# Altium PCB NPU_project_ICE40.PcbDoc
Units mil, origin at the board's own origin, x right, y up, seen from the top; angles counter-clockwise.
Board outline 5540 x 3427.51 mil, 2 copper layers (Top Layer, Bottom Layer); 42 components, 46 nets, 315 pads, 93 vias.
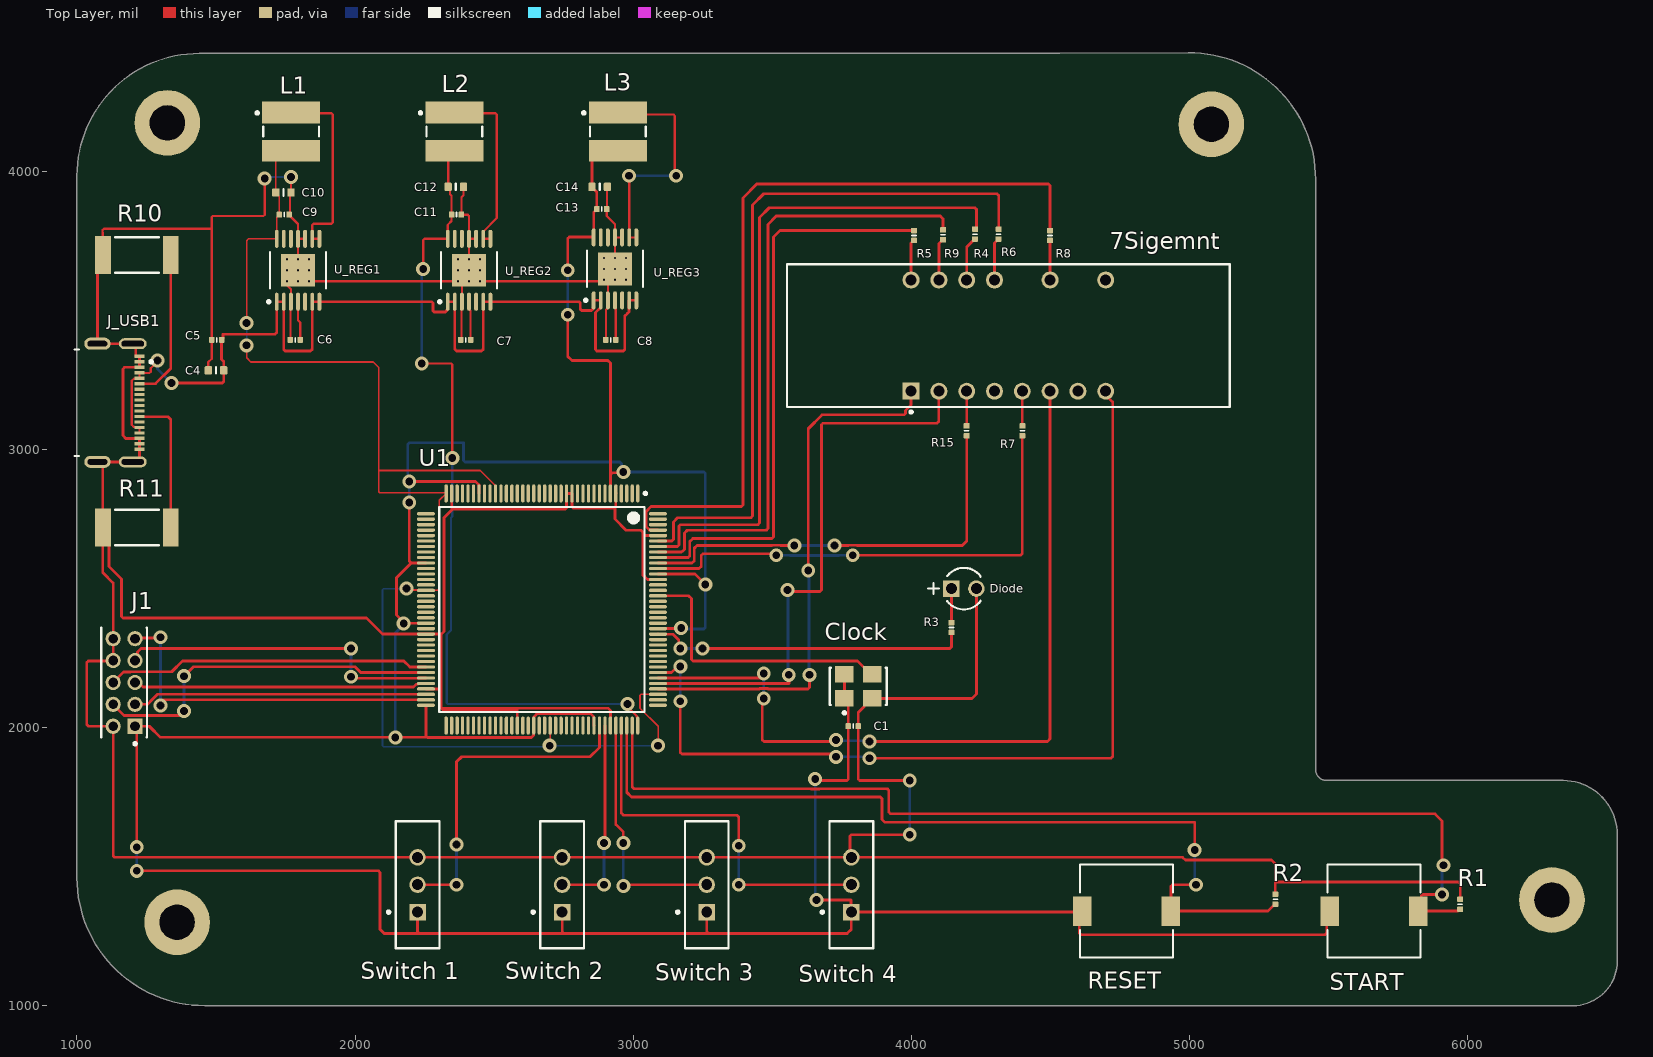
[diagram p0: Top Layer view]
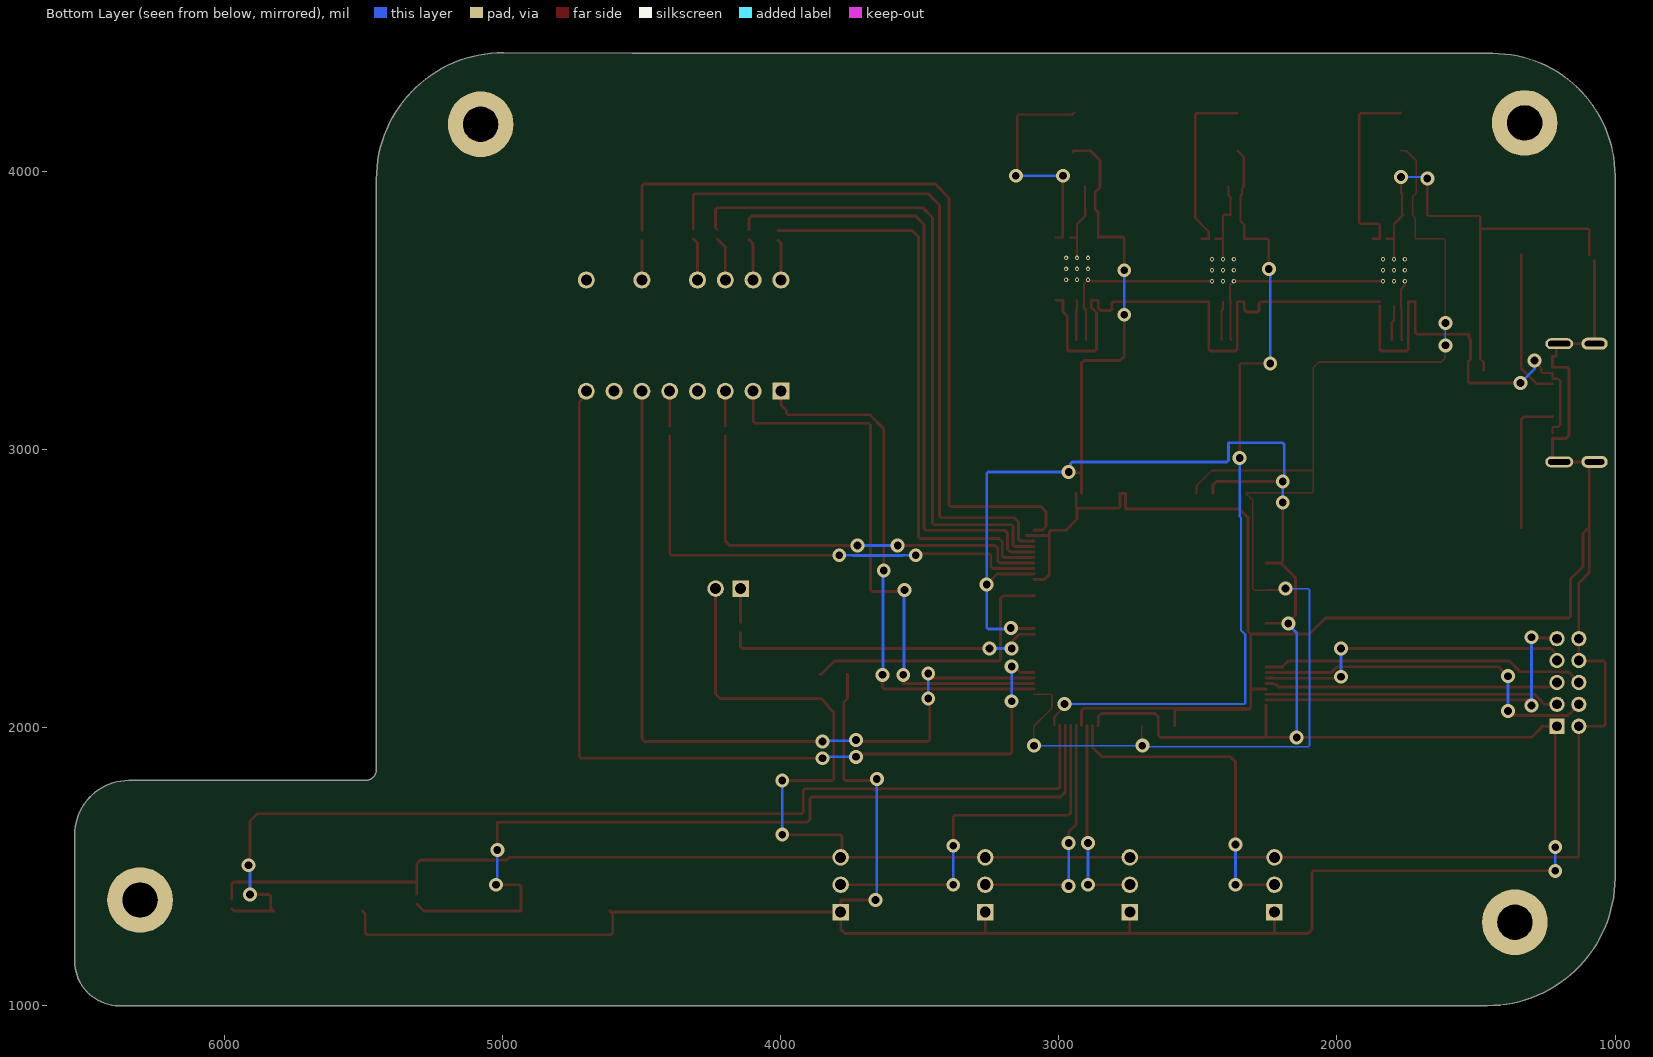
[diagram p1: Bottom Layer view, seen from below]
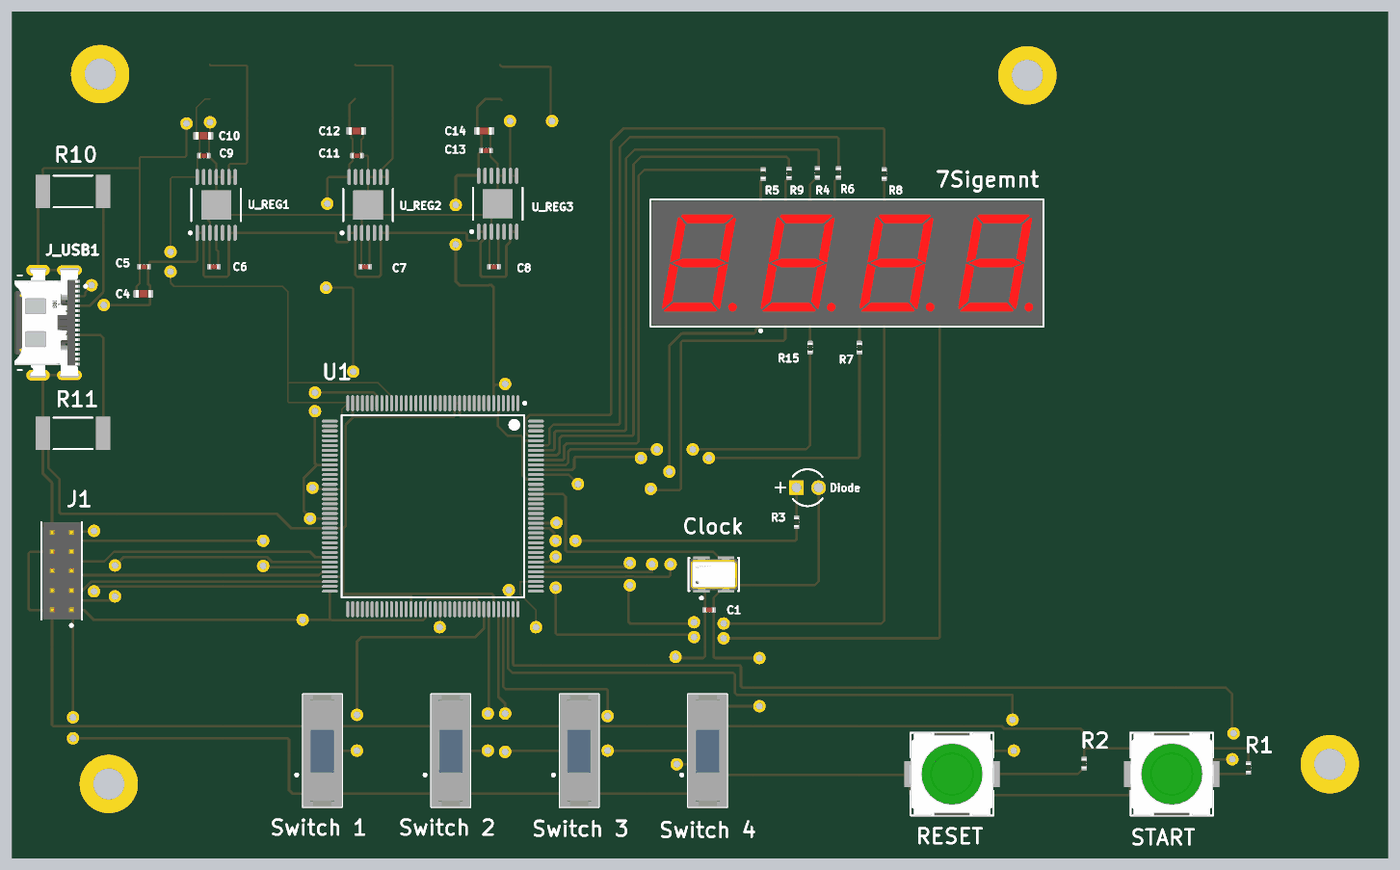
[diagram p2: 3D render of the assembled board from above, using the file's embedded part models]

## Layer stack, top to bottom
Top Solder: solder mask 0.4, Solder Resist, Dk 3.5
Top Layer: signal copper 1.4
Dielectric 1: dielectric 12.6, FR-4, Dk 4.8
Bottom Layer: signal copper 1.4
Bottom Solder: solder mask 0.4, Solder Resist, Dk 3.5

## Board outline
6380,1000 ccw(c6380,1160) 6540,1160 6540,1615 ccw(c6345,1615) 6345,1810 5495,1810 cw(c5495,1850) 5455,1850 5455,3505 ccw(c4633.91,3505.22) 5454.99,3510 5454.99,3971.59 ccw(c4999.06,3971.59) 4996.58,4427.51 4535,4425 1980,4425 cw(c1980,4474.97) 1975.47,4425.21 1975.47,4425 1440,4425 ccw(c1440,3985) 1000,3985 1000,1460 ccw(c1460,1460) 1460,1000

## Design rules (kind name [scope] priority, off if disabled: settings)
Clearance [All] p1: gap=6 ignorepadtopadclearanceinfootprint=TRUE
HoleSize [All] p1: absolutevalues=TRUE maxlimit=125.98 minlimit=0.98 maxpercent=80.000 minpercent=20.000
MinimumSolderMaskSliver [All] p1: minsoldermaskwidth=4
PolygonConnect [All] p1: connectstyle=Relief reliefconductorwidth=10 reliefentries=4 polygonreliefangle="90 Angle" airgapwidth=10
RoutingVias [All] p1: holewidth=28 width=50 viastyle="Through Hole" minholewidth=28 minwidth=50 maxholewidth=28 maxwidth=50
SilkToSilkClearance [All] p1: silktosilkclearance=4
SilkToSolderMaskClearance [IsPad] p1: minsilkscreentomaskgap=4 clearancetoexposedcopper=TRUE
SolderMaskExpansion [All] p1: expansion=0 istentingtop=FALSE
SupplyNets "Schematic Supply Nets_4" [InNet('+3V3')] p1: voltage=0.000
SupplyNets "Schematic Supply Nets_3" [InNet('+1V2')] p2: voltage=0.000
SupplyNets "Schematic Supply Nets_2" [InNet('GND')] p3: voltage=0.000
SupplyNets "Schematic Supply Nets_1" [InNet('+5V_IN')] p4: voltage=0.000
SupplyNets "Schematic Supply Nets" [InNet('+2V5')] p5: voltage=0.000
Width [All] p1: maxlimit=10 minlimit=6 preferedwidth=8 minimp=50.000000 maximp=50.000000 favimp=50.000000
26 further rules are at their usual default settings.

## Classes and differential pairs
component class PowerSupply: C4 C5 C6 C7 C8 C9 C10 C11 C12 C13 C14 J_USB1 L1 L2 L3 R10 R11 U_REG1 U_REG2 U_REG3
component class InputOutput: 7Sigemnt Diode R1 R2 R3 R4 R5 R6 R7 R8 R9 R15 RESET START "Switch 1" "Switch 2" "Switch 3" "Switch 4"
component class Input_Output: U1
component class Configuration: J1
component class Clock: C1 Clock

## Components (designator, comment, footprint, x,y, rotation, side; value= is the part's Value field where it differs from the comment)
7Sigemnt "LTC-4627G" FP-LTC-4627G-MFG 4350,3410 r0 top
C1 "Capacitor 100nF +/-20% 50V 0402" CAPC0402(1005)60_L 3791.97,2005 r180 top value=100nF (schematic designator С1)
C4 "Capacitor 10µF +/-20% 10V 0603" CAPC0603(1608)100_L 1500,3285 r180 top value=10µF (schematic designator С4)
C5 "Capacitor 100nF +/-20% 50V 0402" CAPC0402(1005)60_L 1502.28,3395 r180 top value=100nF (schematic designator С5)
C6 "Capacitor 100nF +/-20% 50V 0402" CAPC0402(1005)60_L 1785,3395 r0 top value=100nF (schematic designator С6)
C7 "Capacitor 100nF +/-20% 50V 0402" CAPC0402(1005)60_L 2397.72,3395 r0 top value=100nF (schematic designator С7)
C8 "Capacitor 100nF +/-20% 50V 0402" CAPC0402(1005)60_L 2920,3395 r0 top value=100nF (schematic designator С8)
C9 "Capacitor 100nF +/-20% 50V 0402" CAPC0402(1005)60_L 1745,3845 r0 top value=100nF (schematic designator С9)
C10 "Capacitor 10µF +/-20% 10V 0603" CAPC0603(1608)100_L 1742.44,3925 r0 top value=10µF (schematic designator С10)
C11 "Capacitor 100nF +/-20% 50V 0402" CAPC0402(1005)60_L 2365,3845 r0 top value=100nF
C12 "Capacitor 10µF +/-20% 10V 0603" CAPC0603(1608)100_L 2362.44,3945 r0 top value=10µF
C13 "Capacitor 100nF +/-20% 50V 0402" CAPC0402(1005)60_L 2887.28,3865 r0 top value=100nF
C14 "Capacitor 10µF +/-20% 10V 0603" CAPC0603(1608)100_L 2880,3945 r0 top value=10µF
Clock "ASFL1-100.000MHZ-EC-T" FP-ASFL1-MFG 3810,2148.31 r0 top
Diode "304090040" LED-2P-2.28-3MM 4189.88,2500 r0 top
J1 "TMM-105-01-L-D" FP-TMM-105-01-L-D-MFG 1169.37,2162.48 r90 top
J_USB1 "CX90M-16P" FP-CX90M-16P-MFG 1105.91,3168.27 r270 top
L1 "74408941010" WE-SPC_4818 51770,54143.9 r0 top
L2 "74408941010" WE-SPC_4818 52357.5,54143.9 r0 top
L3 "74408941010" WE-SPC_4818 52945,54143.9 r0 top
R1 "10KR2F" RESC0402(1005)_L 5975,1365 r90 top value=10k
R2 "10KR2F" RESC0402(1005)_L 5310,1382.72 r90 top value=10k
R3 "330R2J" RESC0402(1005)_L 4145,2360 r90 top value=330
R4 "330R2J" RESC0402(1005)_L 4230,3775 r270 top value=330
R5 "330R2J" RESC0402(1005)_L 4010,3770 r270 top value=330
R6 "330R2J" RESC0402(1005)_L 4315,3775 r270 top value=330
R7 "330R2J" RESC0402(1005)_L 4400,3067.28 r90 top value=330
R8 "330R2J" RESC0402(1005)_L 4500,3770 r270 top value=330
R9 "330R2J" RESC0402(1005)_L 4115,3772.72 r270 top value=330
R10 "5.1K" RESC2512(6432)_M 1215,3700 r180 top
R11 "5.1K" RESC2512(6432)_M 1215,2720 r180 top
R15 "330R2J" RESC0402(1005)_L 4200,3067.28 r90 top value=330
RESET "SKSTAAE010" FP-SKSTAAE010-MFG 4775,1340 r0 top
START "SKSTAAE010" FP-SKSTAAE010-MFG 5665,1340 r0 top
"Switch 1" "EG1218" ESWI-EG1218_V 2225,1435 r90 top
"Switch 2" "EG1218" ESWI-EG1218_V 2745,1435 r90 top
"Switch 3" "EG1218" ESWI-EG1218_V 3265,1435 r90 top
"Switch 4" "EG1218" ESWI-EG1218_V 3785,1435 r90 top
U1 "ICE40HX1K-TQ144" LATC-TQFP-144_N 2672.32,2424.84 r270 top
U_REG1 "LM2852XMXA-1.2/NOPB" MXA14A_N 1795,3645 r90 top
U_REG2 "LM2852XMXA-2.5/NOPB" MXA14A_N 2410,3645 r90 top
U_REG3 "LM2852XMXA-3.3/NOPB" MXA14A_N 2935,3650 r90 top

## Footprints (in the part's own frame and the unit in brackets; to place one, negate y for a bottom-side part, rotate by r counter-clockwise, add the part's x,y. Pads: shape width x height; smd on the part's side, far side on the other; paste and mask are expansions set on the pad)
CAPC0402(1005)60_L [mm] "Chip Capacitor, Body 1.0x0.5mm, Height 0.6mm, IPC High Density"
  rrect25% 0.5x0.55 smd: 1(-0.45,0) 2(0.45,0)
  silkscreen extent 0,-0.2 0,0.2, body extent -0.5,-0.25 0.5,0.25, height 0.6
CAPC0603(1608)100_L [mil] "Chip Capacitor, Body 1.6x0.8mm, Height 1.0mm, IPC High Density"
  rrect25% 26x29.92 smd: 1(-27.56,0) 2(27.56,0)
  silkscreen extent 0,-12 0,12, body extent -31,-16 31,16, height 37
ESWI-EG1218_V [mm] "THD, 3-Leads, Body 11.6x4mm, Pitch 2.5mm"
  rect 1.5x1.5 hole 1: 1(-2.5,0)
  round 1.5 hole 1: 2(0,0) 3(2.5,0)
  silkscreen extent -5.8,-2 5.8,2.77, body extent -5.8,-2 5.8,2, height 7.4
FP-ASFL1-MFG [mm]
  rect 1.7x1.5 smd paste+0 mask+0: 1(-1.27,-1.1) 2(1.27,-1.1) 3(1.27,1.1) 4(-1.27,1.1)
  silkscreen extent -2.6,-2.54 2.6,1.7, body extent -2.7,-1.95 2.7,1.95, height 0.25
FP-CX90M-16P-MFG [mm]
  rect 0.3x0.9 smd paste+0 mask+0: 1(-4.25,3.025) 2(4.25,3.025) A1(-3.75,3.025) A4(-2.75,3.025) A5(-1.75,3.025) A6(-0.75,3.025) A7(0.75,3.025) A8(1.75,3.025) A9(2.75,3.025) A12(3.75,3.025) B1(3.25,3.025) B4(2.25,3.025) B5(1.25,3.025) B6(0.25,3.025) B7(-0.25,3.025) B8(-1.25,3.025) B9(-2.25,3.025) B12(-3.25,3.025)
  rrect100% 1x2.55 hole 2.05 slot 0.5 at 0 deg paste-2539.97 mask+0: 3(-5.4,2.405) 4(5.4,2.405)
  rrect100% 1.1x2.4 hole 1.8 slot 0.5 at 0 deg paste-2539.97 mask+0: 5(-5.4,-0.825) 6(5.4,-0.825)
  silkscreen extent -4.87,-2.9 4.87,4.2, body extent -6.05,-3.37 6.05,3.78, height 0.25
FP-LTC-4627G-MFG [mm]
  rect 1.55x1.55 hole 1 paste-2539.97 mask+0: 1(-8.89,-5.08)
  round 1.55 hole 1 paste-2539.97 mask+0: 2(-6.35,-5.08) 3(-3.81,-5.08) 4(-1.27,-5.08) 5(1.27,-5.08) 6(3.81,-5.08) 7(6.35,-5.08) 8(8.89,-5.08) 9(8.89,5.08) 11(3.81,5.08) 13(-1.27,5.08) 14(-3.81,5.08) 15(-6.35,5.08) 16(-8.89,5.08)
  silkscreen extent -20.21,-7.1 20.21,6.53, body extent -20.31,-6.63 20.31,6.63, height 0.25
FP-SKSTAAE010-MFG [mm]
  rect 1.7x2.7 smd paste+0 mask+0: 1(-4.05,0) 2(4.05,0)
  silkscreen extent -4.25,-4.25 4.25,4.25, body extent -5,-4.35 5,4.35, height 0.25
FP-TMM-105-01-L-D-MFG [mm]
  rect 1.39x1.39 hole 0.89 paste-2539.97 mask+0: 1(-4,-1)
  round 1.39 hole 0.89 paste-2539.97 mask+0: 2(-4,1) 3(-2,-1) 4(-2,1) 5(0,-1) 6(0,1) 7(2,-1) 8(2,1) 9(4,-1) 10(4,1)
  silkscreen extent -5.72,-2.09 5,2.09, body extent -5.1,-2.13 5.1,2.13, height 0.25
LATC-TQFP-144_N [mm] "QFP, 144-Leads, Body 20x20mm, Pitch 0.5mm, IPC Medium Density"
  oval 1.65x0.3 smd: 1(-10.6,8.75) 2(-10.6,8.25) 3(-10.6,7.75) 4(-10.6,7.25) 5(-10.6,6.75) 6(-10.6,6.25) 7(-10.6,5.75) 8(-10.6,5.25) 9(-10.6,4.75) 10(-10.6,4.25) 11(-10.6,3.75) 12(-10.6,3.25) 13(-10.6,2.75) 14(-10.6,2.25) 15(-10.6,1.75) 16(-10.6,1.25) 17(-10.6,0.75) 18(-10.6,0.25) 19(-10.6,-0.25) 20(-10.6,-0.75) 21(-10.6,-1.25) 22(-10.6,-1.75) 23(-10.6,-2.25) 24(-10.6,-2.75) 25(-10.6,-3.25) 26(-10.6,-3.75) 27(-10.6,-4.25) 28(-10.6,-4.75) 29(-10.6,-5.25) 30(-10.6,-5.75) 31(-10.6,-6.25) 32(-10.6,-6.75) 33(-10.6,-7.25) 34(-10.6,-7.75) 35(-10.6,-8.25) 36(-10.6,-8.75) 73(10.6,-8.75) 74(10.6,-8.25) 75(10.6,-7.75) 76(10.6,-7.25) 77(10.6,-6.75) 78(10.6,-6.25) 79(10.6,-5.75) 80(10.6,-5.25) 81(10.6,-4.75) 82(10.6,-4.25) 83(10.6,-3.75) 84(10.6,-3.25) 85(10.6,-2.75) 86(10.6,-2.25) 87(10.6,-1.75) 88(10.6,-1.25) 89(10.6,-0.75) 90(10.6,-0.25) 91(10.6,0.25) 92(10.6,0.75) 93(10.6,1.25) 94(10.6,1.75) 95(10.6,2.25) 96(10.6,2.75) 97(10.6,3.25) 98(10.6,3.75) 99(10.6,4.25) 100(10.6,4.75) 101(10.6,5.25) 102(10.6,5.75) 103(10.6,6.25) 104(10.6,6.75) 105(10.6,7.25) 106(10.6,7.75) 107(10.6,8.25) 108(10.6,8.75)
  oval 0.3x1.65 smd: 37(-8.75,-10.6) 38(-8.25,-10.6) 39(-7.75,-10.6) 40(-7.25,-10.6) 41(-6.75,-10.6) 42(-6.25,-10.6) 43(-5.75,-10.6) 44(-5.25,-10.6) 45(-4.75,-10.6) 46(-4.25,-10.6) 47(-3.75,-10.6) 48(-3.25,-10.6) 49(-2.75,-10.6) 50(-2.25,-10.6) 51(-1.75,-10.6) 52(-1.25,-10.6) 53(-0.75,-10.6) 54(-0.25,-10.6) 55(0.25,-10.6) 56(0.75,-10.6) 57(1.25,-10.6) 58(1.75,-10.6) 59(2.25,-10.6) 60(2.75,-10.6) 61(3.25,-10.6) 62(3.75,-10.6) 63(4.25,-10.6) 64(4.75,-10.6) 65(5.25,-10.6) 66(5.75,-10.6) 67(6.25,-10.6) 68(6.75,-10.6) 69(7.25,-10.6) 70(7.75,-10.6) 71(8.25,-10.6) 72(8.75,-10.6) 109(8.75,10.6) 110(8.25,10.6) 111(7.75,10.6) 112(7.25,10.6) 113(6.75,10.6) 114(6.25,10.6) 115(5.75,10.6) 116(5.25,10.6) 117(4.75,10.6) 118(4.25,10.6) 119(3.75,10.6) 120(3.25,10.6) 121(2.75,10.6) 122(2.25,10.6) 123(1.75,10.6) 124(1.25,10.6) 125(0.75,10.6) 126(0.25,10.6) 127(-0.25,10.6) 128(-0.75,10.6) 129(-1.25,10.6) 130(-1.75,10.6) 131(-2.25,10.6) 132(-2.75,10.6) 133(-3.25,10.6) 134(-3.75,10.6) 135(-4.25,10.6) 136(-4.75,10.6) 137(-5.25,10.6) 138(-5.75,10.6) 139(-6.25,10.6) 140(-6.75,10.6) 141(-7.25,10.6) 142(-7.75,10.6) 143(-8.25,10.6) 144(-8.75,10.6)
  silkscreen extent -10.72,-9.37 9.37,9.57, body extent -10,-10 10,10, height 1.6
LED-2P-2.28-3MM [mm] "LED, 2-Leads, Dia 3mm, Pitch 2.28mm"
  rect 1.5x1.5 hole 1: 1(-1.14,0)
  round 1.5 hole 1: 2(1.14,0)
  silkscreen extent -3.29,-1.9 1.52,1.9, body extent -1.9,-1.91 1.52,1.91, height 5.3
MXA14A_N [mm] "TSOP, 14-Leads, Body 5x4.4mm, Pitch 0.65mm, Thermal Pad, IPC Medium Density"
  oval 1.65x0.35 smd: 1(-2.875,1.95) 2(-2.875,1.3) 3(-2.875,0.65) 4(-2.875,0) 5(-2.875,-0.65) 6(-2.875,-1.3) 7(-2.875,-1.95) 8(2.875,-1.95) 9(2.875,-1.3) 10(2.875,-0.65) 11(2.875,0) 12(2.875,0.65) 13(2.875,1.3) 14(2.875,1.95)
  rect 3x3.1 smd: 15(0,0)
  silkscreen extent -3,-2.55 1.65,2.8, body extent -2.25,-2.55 2.25,2.55, height 1.1
RESC0402(1005)_L [mm] "Chip Resistor, Body 1.0x0.5mm, IPC High Density"
  rrect25% 0.5x0.55 smd: 1(-0.45,0) 2(0.45,0)
  silkscreen extent 0,-0.2 0,0.2, body extent -0.5,-0.25 0.5,0.25, height 0.3
RESC2512(6432)_M [mm] "Chip Resistor, Body 6.4x3.2mm, IPC Low Density"
  rect 1.45x3.45 smd: 1(-3.1,0) 2(3.1,0)
  silkscreen extent -2,-1.62 2,1.62, body extent -3.25,-1.7 3.25,1.7, height 0.75
WE-SPC_4818 [mm] "SMD Shielded Power Inductor, body 4.8x4.8mm"
  rect 5.3x2 smd: 1(-1270,-1268.25) 2(-1270,-1271.75)
  silkscreen extent -1273.22,-1270.45 -1267.45,-1268.18, body extent -1272.41,-1272.41 -1267.59,-1267.59, height 1.8

## Part data
7Sigemnt: library part CMP-031-00011-1, "7 Seg Numeric LED Display, 4-Character, Green, 10mm", Case/Package=PDIP, Max Operating Temperature=85°C, Min Operating Temperature=-35°C, Mounting Technology="Through Hole", Pins=14
C1 C5 C6 C7 C8 C9 C11 C13: library part CMP-001-00067-3, "Chip Capacitor, 100nF +/-20%, 50V, 0402, Thickness 0.6 mm", Case/Package=0402, Max Operating Temperature=85°C, Min Operating Temperature=-55°C, Tolerance=10%, Voltage Rating=50V, Mounting Technology=SMT, Pins=2
C4 C10 C12 C14: library part CMP-001-00075-4, "Chip Capacitor, 10µF +/-20%, 10V, 0603, Thickness 1 mm", Case/Package=0603, Max Operating Temperature=85°C, Min Operating Temperature=-55°C, Tolerance=10%, Voltage Rating=10V, Mounting Technology=SMT, Pins=2
Clock: library part CMP-031-00009-1, "Oscillator Xo 100MHZ ±50PPM 15PF Hcmos/ttl 60% 3.3V 4-PIN SMD T/r", Case/Package=SMD/SMT, Max Operating Temperature=70°C, Max Supply Voltage=3.63V, Min Operating Temperature=-20°C, Min Supply Voltage=2.97V, Mounting Technology="Surface Mount", Pins=4
Diode: library part CMP-007-00006-2, "Green LED, 80 mW, 20 mA, -25 to 85 degC, 2-Pin THD", Manufacturer="Shenzhen CGX", Package Description="2-Pin Through Hole Device, Dia 3 mm, Pitch 2.28 mm", Case/Package=304090040, Datasheet URL=http://datasheet.octopart.com/304090040-Chengguangxing-datasheet-62330655.pdf, Datasheet Version="Rev. 1.0, 09/2014", Manufacturer URL=http://szcgx.com/, Mounting Technology=TH, Package Reference=304090040, RoHS Compliant=Unknown
J1: library part CMP-031-00007-1, "TMM ROHS3Compliant COMMERCIAL 2012 Connector Header -55C~125C 3.2A per Contact 500V 3.94mm", Max Operating Temperature=125°C, Min Operating Temperature=-55°C
J_USB1: library part CMP-031-00012-1, "USB Connector, USB Type C, USB 2.0, Receptacle, 16 Ways, Surface Mount, Right Angle", Max Operating Temperature=85°C, Min Operating Temperature=-40°C, Pins=16
L1 L2 L3: library part CMP-031-00017-1, "Power Choke Shielded Wirewound 1uH 20% 100KHz Ferrite 3A 0.0295Ohm DCR T/R", Max Operating Temperature=125°C, Min Operating Temperature=-40°C, Pins=2
R1 R2: library part CMP-009-00066-2, "10K 0.063W 1% 0402 (1005 Metric)  SMD", Case/Package=0402, Power=63mW, Tolerance=1%, Mounting Technology=SMT, Pins=2
R3 R4 R5 R6 R7 R8 R9 R15: library part CMP-009-00095-2, "330R 0.063W 5% 0402 (1005 Metric)  SMD", Case/Package=0402, Power=63mW, Tolerance=5%, Mounting Technology=SMT, Pins=2
R10 R11: library part CMP-031-00013-1, "Fixed Resistor, Metal Glaze/Thick Film, 1W, 5.1ohm, 500V, 5% +/-Tol, Surface Mount, 2512", Case/Package=2512, Max Operating Temperature=155°C, Min Operating Temperature=-55°C, Mounting Technology="Surface Mount"
RESET START: library part CMP-031-00010-1, "Switch Tactile N.O. SPST Round Button J-Bend 0.05A 16VDC 500000Cycles 4N SMD T/R", Max Operating Temperature=90°C, Min Operating Temperature=-40°C, Mounting Technology="Surface Mount"
"Switch 1" "Switch 2" "Switch 3" "Switch 4": library part CMP-011-00006-2, "Slide Switch, SPDT, 500 V, -20 to 70 degC, 3-Pin THD, RoHS, Bulk", Contact Current Rating=200mA, Manufacturer=E-Switch, Max Operating Temperature=70°C, Min Operating Temperature=-20°C, Operating Force=250gf, Package Description="3-Pin Through Hole Device, Body 11.6 x 4 mm, Pitch 2.5 mm", Package Quantity=1000, Voltage Rating (AC)=30V, Case/Package=EG1218, Contact Finish=Silver, Contact Material=Copper, Contact Plating=Silver, Current Rating=200mA, Datasheet URL=https://www.e-switch.com/system/asset/product_line/data_sheet/119/EG.pdf, Datasheet Version=Oct-15, Manufacturer URL=http://www.e-switch.ch/en/, Mounting Technology=TH, Package Reference=EG1218, Packaging=Bulk, Pins=3, RoHS Compliant=True, Throw Configuration=SPDT, Voltage Rating (DC)=30V
U1: library part CMP-031-00018-1, "FPGA iCE40 HX Family 1280 Cells 40nm Technology 1.2V 144-Pin TQFP Tray", Case/Package=LFQFP, Max Operating Temperature=85°C, Max Supply Voltage=1.26V, Min Operating Temperature=-40°C, Min Supply Voltage=1.14V, Pins=144
U_REG1: library part CMP-031-00019-1, "2A 500/1500kHz Synchronous Buck Regulator 14-HTSSOP -40 to 125", Case/Package="HTSSOP EP", Max Operating Temperature=125°C, Max Supply Voltage=5.5V, Min Operating Temperature=-40°C, Mounting Technology="Surface Mount", Pins=14
U_REG2: library part CMP-031-00020-1, "2A 500/1500kHz Synchronous Buck Regulator 14-HTSSOP -40 to 125", Case/Package="HTSSOP EP", Max Operating Temperature=125°C, Max Supply Voltage=5.5V, Min Operating Temperature=-40°C, Min Supply Voltage=2.85V, Mounting Technology="Surface Mount", Pins=14
U_REG3: library part CMP-031-00015-1, "2A 500/1500kHz Synchronous Buck Regulator 14-HTSSOP -40 to 125", Case/Package="HTSSOP EP", Max Operating Temperature=125°C, Max Supply Voltage=5.5V, Min Operating Temperature=-40°C, Min Supply Voltage=2.85V, Mounting Technology="Surface Mount", Pins=14

## Free pads (board coordinates)
  round 236.22 hole 125.98: 4(1325,4175) 5(1360,1300) 6(6305,1380) 7(5080,4170)

## Via types
v1: diameter 50, hole 28, Top Layer to Bottom Layer, 66 vias
v2: diameter 15.75, hole 7.87, Top Layer to Bottom Layer, 27 vias

## Nets (pads, with @x,y where several pads share a name; then routed paths per layer and width w, separated by ;. In a path a pad name is that pad's centre, name@x,y a point inside that pad or via, vN(x,y) a via of type N, cw(c..) or ccw(c..) an arc to the next point about the centre after c; other vN are vias at no path point)
+1V2: C9.1 C10.1 L1.2 U1.27 U1.36 U1.51 U1.92 U1.111 U_REG1.14 | length 5011.1
  Top Layer w6: v1(1610,3375) 1610,3330 1625,3315 2065,3315 2085,3295 2085,2925 ; v1(1610,3455) 1610,3751.38 1616.81,3758.19 U_REG1.14 1718.23,3834.96 1727.28,3844.02 C9.1 1727.28,3910.5 1714.88,3922.9 C10.1 1714.88,4038.63 1751.25,4075 L1.2 ; v1(2185,2500) 2190.15,2494.85 2253.89,2494.85 U1.51 2296.48,2493.74 2303.24,2500.5 2303.24,2817.57 U1.36 2327.83,2842.32 2325.15,2845 2088.51,2845 2085,2848.51 2085,2925 ; U1.27 2505,2870.13 2450.13,2925 2085,2925 ; v1(2700,1935) 2701.85,1936.85 U1.92 ; U1.111 3089.37,2120 3028.51,2120 3025,2116.49 3025,2070 3090,2005 v1(3090,1935)
  Bottom Layer w6: v1(1610,3375) v1(1610,3455) ; v1(2185,2500) 2102.51,2500 2099,2496.49 2099,1934.51 2102.51,1931 2696,1931 v1(2700,1935) v1(3090,1935)
+2V5: C11.1 C12.1 L2.2 U1.108 U_REG2.14 | length 2953.4
  Top Layer w8: v1(2240,3310) 2345.31,3310 2350,3305.31 v1(2350,2970) ; v1(2245,3650) 2245,3753.5 2249.69,3758.19 U_REG2.14 2333.23,3808.2 2347.2,3822.17 2347.2,3844.91 C11.1 2347.28,3912.72 2341.96,3918.04 2341.96,3937.92 C12.1 2334.88,4052.38 L2.2 ; v1(2980,2085) 2980,2075 3013.03,2041.97 3013.03,2038.9 3016.81,2035.13 U1.108
  Bottom Layer w8: v1(2240,3310) 2240,3645 v1(2245,3650) ; v1(2350,2970) 2350,2760 2345,2755 2345,2350 2330,2335 2330,2089.69 2334.69,2085 v1(2980,2085)
+3V3: "Switch 1.1" "Switch 2.1" "Switch 3.1" "Switch 4.1" C1.2 C13.1 C14.1 Clock.1 Clock.4 J1.1 L3.2 RESET.1 START.1 U1.6 U1.30 U1.46 U1.57 U1.72 U1.89 U1.100 U1.123 U1.133 U_REG3.14 | length 13712.1
  Top Layer w10: v1(1215,1485) 2084.14,1485 2090,1479.14 2090,1275 2105,1260 2230.86,1260 ; v1(1215,1570) 1215,1998.74 J1.1 1260,2005 1300,1965 v1(2145,1965) 2255,1965 ; v1(2195,2810) 2195,2599.33 2202.16,2592.16 ; v1(2195,2885) 2195.64,2885.64 2433.26,2885.64 2445.6,2873.31 2445.6,2842.51 U1.30 ; U1.46@2223.86,2592.16 2202.16,2592.16 ; U1.46@2223.86,2592.51 2254.65,2592.51 U1.46 ; 2225,1336.57 2225,1265.86 2230.86,1260 ; 2255,1970 2260.96,1964.04 2634.04,1964.04 2642.45,1972.45 2642.45,2007.17 U1.89 2643.14,2007.87 2643.14,2038.66 2655.48,2051 2846.65,2051 2858.98,2038.66 2858.98,2007.87 U1.100 ; 2255,1973.05 U1.72 ; U1.57 2254.68,2375.32 2175.32,2375.32 v1(2175,2375) 2175,2379.57 2149,2405.57 2149,2539 2202.16,2592.16 ; 2745,1336.57 2745,1265.86 2750.86,1260 ; v1(2765,3485) 2765,3335 2780,3320 2900,3320 2900.86,3320.86 2909.14,3320.86 2918.38,3311.62 2918.38,2910 ; v1(2765,3645) 2765,3759.14 2770.86,3765 2856.48,3765 U_REG3.14@2858.23,3763.25 ; U_REG3.14 U_REG3.14@2858.23,3763.25 ; U1.6 2918.38,2910 ; L3.2@2950,4070 L3.2 2886.81,4075 2852.44,4040.63 C14.1 2852.44,3943.04 2869.57,3925.91 C13.1 2869.57,3864.02 2858.23,3852.68 U_REG3.14@2858.23,3763.25 ; v1(2965,2919.64) 2961.97,2916.62 2925,2916.62 2918.38,2910 ; U1.133 3222.21,2552.79 v1(3260,2515) ; U1.123@3089.99,2355.6 3090.68,2356.29 3171.29,2356.29 v1(3172.96,2357.96) ; 3265,1336.57 3265,1265.86 3270.86,1260 ; v1(3655,1815) 3660,1810 3768.39,1810 3774.25,1815.86 C1.2 3774.25,2090.75 Clock.1 Clock.4 ; v1(3660,1380) 3784.14,1380 3784.14,1337.43 3785,1336.57 ; RESET.1 RESET.1@4612.13,1336.57 ; START.1 5495,1329.45 5495,1260.86 5489.14,1255 4610.86,1255 4605,1260.86 4605,1329.45 RESET.1@4612.13,1336.57 ; 2230.86,1260 2750.86,1260 ; 2750.86,1260 3270.86,1260 ; 3270.86,1260 3770,1260 3785,1275 3785,1336.57 ; 3785,1336.57 RESET.1@4612.13,1336.57
  Bottom Layer w10: v1(1215,1485) v1(1215,1570) ; v1(2145,1965) 2145,2341.36 2175,2371.36 v1(2175,2375) ; v1(2195,2810) v1(2195,2885) 2190,2890 2190,3019.14 2195.86,3025 2390,3025 2390,2960.86 2395.86,2955 2952.07,2955 2957.93,2949.14 2957.93,2926.71 v1(2965,2919.64) 3254.14,2919.64 3260,2913.79 3260,2360.86 3254.14,2355 3175.91,2355 v1(3172.96,2357.96) ; v1(2765,3485) v1(2765,3645) ; v1(3655,1815) 3655,1390 3660,1385 v1(3660,1380)
+5V_IN: C4.1 C5.1 J_USB1.A4 J_USB1.A9 J_USB1.B4 J_USB1.B9 U_REG1.1 U_REG1.2 U_REG1.6 U_REG1.7 U_REG2.1 U_REG2.2 U_REG2.6 U_REG2.7 U_REG3.1 U_REG3.2 U_REG3.6 U_REG3.7 | length 3593.4
  Top Layer w8: J_USB1.A9 J_USB1.B4 1223.09,3081.59 1205.01,3081.59 1197.28,3089.32 1197.28,3247.21 1205.01,3254.94 1223.09,3254.94 J_USB1.B9 J_USB1.A4 1226.54,3275 1260.31,3275 1265,3279.69 1265,3292.67 1290,3317.67 v1(1290,3320)
  Top Layer w10: v1(1340,3240) 1522.87,3240 1527.56,3244.69 C4.1 1527.56,3317.44 1520,3325 C5.1@1520,3394.02 ; C5.1 1524.69,3399.69 1524.69,3415 1712.37,3415 1718.23,3420.86 1718.23,3530.07 1719.97,3531.81 1742.07,3531.81 1743.82,3530.07 1743.82,3359.69 1748.5,3355 1840.31,3355 1846.18,3360.87 U_REG1.6@1846.18,3516.81 ; U_REG1.6 U_REG1.7 2275.31,3531.81 2280,3527.13 2280,3499.69 2284.69,3495 2325.31,3495 2330,3499.69 2330,3501.43 2333.23,3504.66 U_REG2.1 U_REG2.2 2358.82,3361.18 2365,3355 2455.31,3355 2461.18,3360.87 U_REG2.6 U_REG2.7 2805.31,3531.81 2810,3527.13 2810,3504.69 2814.69,3500 2850.31,3500 2855,3504.69 2855,3506.43 2858.23,3509.66 U_REG3.1 U_REG3.2 2883.82,3511.22 2865,3492.4 2865,3359.69 2869.69,3355 2965.31,3355 2970,3359.69 2970,3480 2980,3490 2980.31,3490 2985.08,3494.76 2985.08,3535.71 U_REG3.6 U_REG3.7
  Bottom Layer w10: v1(1290,3320) 1290,3290 v1(1340,3240)
GND: "Switch 1.3" "Switch 2.3" "Switch 3.3" "Switch 4.3" C1.1 C4.2 C5.2 C6.1 C7.1 C8.1 C9.2 C10.2 C11.2 C12.2 C13.2 C14.2 Clock.2 Diode.2 J1.2 J1.8 J1.10 J_USB1.1 J_USB1.2 J_USB1.3 J_USB1.4 J_USB1.5 J_USB1.6 J_USB1.A1 J_USB1.A12 J_USB1.B1 J_USB1.B12 R1.2 R2.2 R10.2 R11.2 U1.5 U1.13 U1.14 U1.35 U1.59 U1.69 U1.86 U1.103 U1.132 U1.140 U_REG1.3 U_REG1.10 U_REG1.11 U_REG1.15 U_REG2.3 U_REG2.10 U_REG2.11 U_REG2.15 U_REG3.3 U_REG3.10 U_REG3.11 U_REG3.15 | length 18138.1
  Top Layer w8: R10.2 1092.95,3779.91 1092.06,3780.8 1092.06,3789.57 1096.75,3794.25 1479.88,3794.25 1484.57,3789.57 ; C4.2 1472.44,3314.84 1484.57,3326.97 C5.2 1484.57,3789.57 ; v1(1675,3975) 1675,3844.69 1670.31,3840 1489.25,3840 1484.57,3835.31 1484.57,3789.57 ; v2(1755.63,3605.63) 1755.63,3590.63 1769.41,3576.85 U_REG1.3 1769.41,3516.81 1768.35,3515.75 1768.35,3396.06 C6.1 ; C9.2@1762.72,3844.02 1795,3811.73 U_REG1.11 ; C9.2 1766.36,3848.64 1766.36,3921.36 C10.2 v1(1770,3980) ; v2(1795,3684.37) U_REG1.11 ; U_REG1.10 U_REG1.11 ; v2(1834.37,3605.63) v2(2370.63,3605.63) 2384.41,3591.85 U_REG2.3 2383.3,3530.71 2383.3,3398.3 C7.1 ; C12.2 2390,3915 2382.72,3907.72 C11.2 2405.31,3845 2410,3840.31 U_REG2.11 ; v2(2410,3684.37) U_REG2.11 ; U_REG2.10 U_REG2.11 ; v2(2449.37,3605.63) 2890.63,3605.63 v2(2895.63,3610.63) 2909.41,3596.85 U_REG3.3 2909.41,3509.66 2902.28,3502.53 C8.1 ; C14.2 2906.28,3943.72 2906.28,3866.28 C13.2 2905,3840 2935,3810 U_REG3.11 ; v2(2935,3689.37) U_REG3.11 ; U_REG3.10 U_REG3.11
  Top Layer w10: J_USB1.6 J_USB1.6@1077.57,2955.67 ; R10.2@1073.43,3680.47 J_USB1.5 J_USB1.3 1211.28,3370.17 1211.28,3337.5 1213.19,3335.59 J_USB1.1 J_USB1.A1 J_USB1.B12 1170.91,3296.22 1165,3290.31 1165,3050.63 1175.31,3040.31 J_USB1.B1 J_USB1.A12 J_USB1.2 1225,2970.16 1210.51,2955.67 J_USB1.4 J_USB1.6@1077.57,2955.67 ; U1.69 2305.31,2139.41 2310,2134.72 ; 2347.52,2789.01 U1.35 ; U1.86 2583.74,2065.31 2314.69,2065.31 2310,2070 ; U1.103 2918.38,2061.62 2910,2070 2310,2070 ; U1.5@2938.8,2842.89 U1.5 2938.07,2793.78 2933.38,2789.1 ; U1.132 3051.89,2533.11 3035,2550 3035,2690.59 ; U1.140@3117.25,2690.59 U1.140 3035,2690.59 ; v1(3995,1615) 3785.86,1615 3780,1609.14 3780,1538.42 3785,1533.42 ; v1(3995,1810) 3815.54,1810 3809.68,1815.86 C1.1 3810,2005.32 3810,2055 3831.54,2076.54 3831.54,2080.47 3856.06,2105 Clock.2 4219.14,2105 4234.76,2120.62 Diode.2 ; R2.2 5310,1445 ; R1.2 5975,1439.14 5969.14,1445 5310,1445 ; J_USB1.6@1077.57,2955.67 1092.95,2940.28 R11.2 ; R11.2 1092.95,2557.05 1130,2520 J1.10 J1.8 1128.78,2240 1040.86,2240 1035,2234.14 1035,2010.86 1040.86,2005 J1.2 1130,1539.28 1135.86,1533.42 2225,1533.42 2745,1533.42 3265,1533.42 3785,1533.42 ; R11.2 1115,2697.95 1115,2580 1160,2535 1160,2400 1165.93,2394.07 2040.93,2394.07 2098.74,2336.26 U1.59 2310,2336.26 ; 2310,2070 2310,2134.72 ; 2310,2134.72 2310,2336.26 ; 2310,2336.26 2310.94,2336.26 2319.98,2345.3 2319.98,2754.98 2351.49,2786.49 2756.22,2786.49 2760.9,2791.18 U1.14 U1.13 2780.59,2793.78 2785.28,2789.1 2933.38,2789.1 ; 2933.38,2789.1 2935,2787.48 2935,2750 2975,2710 3029.14,2710 3035,2704.14 3035,2690.59 ; 3785,1533.42 4976.58,1533.42 4986.58,1523.42 5296.58,1523.42 5310,1510 5310,1445
  Bottom Layer w8: v1(1675,3975) 1680,3980 v1(1770,3980)
  Bottom Layer w10: v1(3995,1615) v1(3995,1810)
  other v2: 1795,3605.63 2410,3605.63 2935,3610.63 2974.37,3610.63 1755.63,3645 1795,3645 1834.37,3645 2370.63,3645 2410,3645 2449.37,3645 2895.63,3650 2935,3650 2974.37,3650 1755.63,3684.37 1834.37,3684.37 2370.63,3684.37 2449.37,3684.37 2895.63,3689.37 2974.37,3689.37
Net7Sigemnt_1: 7Sigemnt.1 U1.112 | length 1941.5
  Top Layer w10: U1.112 3453.5,2139.41 3455.09,2141 3484.91,2141 3486.5,2139.41 3629.14,2139.41 3635,2145.27 v1(3635,2190) ; v1(3630,2565) 3630,3075 3680,3125 3974.14,3125 3980,3130.86 3980,3140 4000,3160 7Sigemnt.1
  Bottom Layer w10: v1(3630,2565) 3632.5,2562.5 3632.5,2192.5 v1(3635,2190)
Net7Sigemnt_2: 7Sigemnt.2 U1.113 | length 2066.1
  Top Layer w10: U1.113 3560.91,2159.09 3560.91,2189.09 v1(3560,2190) ; v1(3555,2495) 3560,2490 3671.98,2490 3677.84,2495.86 3677.84,3089.14 3683.7,3095 4093.63,3095 4099.49,3100.86 4099.49,3209.49 7Sigemnt.2
  Bottom Layer w10: v1(3555,2495) 3557.5,2492.5 3557.5,2192.5 v1(3560,2190)
Net7Sigemnt_3: 7Sigemnt.3 R15.2 | length 125
  Top Layer w10: R15.2 7Sigemnt.3
Net7Sigemnt_5: 7Sigemnt.5 R7.2 | length 125
  Top Layer w10: R7.2 7Sigemnt.5
Net7Sigemnt_6: 7Sigemnt.6 U1.114 | length 2931.5
  Top Layer w10: U1.114 3466.22,2178.78 3470,2182.56 v1(3470,2195.09) ; v1(3470,2105) 3465,2100 3465,1955.86 3470.86,1950 3725,1950 v1(3730,1955) ; v1(3850,1950) 4490,1950 4500,1960 7Sigemnt.6
  Bottom Layer w10: v1(3470,2105) v1(3470,2195.09) ; v1(3730,1955) 3732.5,1952.5 3847.5,1952.5 v1(3850,1950)
Net7Sigemnt_8: 7Sigemnt.8 U1.115 | length 3291.4
  Top Layer w10: U1.115 3137.64,2198.46 3159.18,2220 v1(3170,2220) ; v1(3170,2095) 3170,1910.86 3175.86,1905 3724.14,1905 3730,1899.14 v1(3730,1895) ; v1(3850,1890) 4719.14,1890 4725,1895.86 4725,3171.19 4700,3196.19 7Sigemnt.8
  Bottom Layer w10: v1(3170,2095) v1(3170,2220) ; v1(3730,1895) 3845,1895 v1(3850,1890)
Net7Sigemnt_11: 7Sigemnt.11 R8.2 | length 142.3
  Top Layer w10: 7Sigemnt.11 R8.2
Net7Sigemnt_13: 7Sigemnt.13 R6.2 | length 154.1
  Top Layer w10: 7Sigemnt.13 4300,3743.27 4314.02,3757.28 R6.2
Net7Sigemnt_14: 7Sigemnt.14 R4.2 | length 160.3
  Top Layer w10: 7Sigemnt.14 4200,3728.27 4229.02,3757.28 R4.2
Net7Sigemnt_15: 7Sigemnt.15 R9.2 | length 151.8
  Top Layer w10: 7Sigemnt.15 4100,3740.98 4114.02,3755 R9.2
Net7Sigemnt_16: 7Sigemnt.16 R5.2 | length 147
  Top Layer w10: 7Sigemnt.16 4000,3743.27 4009.02,3752.28 R5.2
NetClock_3: Clock.3 U1.129 | length 1015.2
  Top Layer w10: U1.129 3200.09,2474.05 3210,2464.14 3210,2245.86 3215.86,2240 3807.68,2240 3856.06,2191.61 Clock.3
NetDiode_1: Diode.1 R3.2 | length 122.3
  Top Layer w10: R3.2 Diode.1
NetJ1_3: J1.3 U1.70 | length 1061.7
  Top Layer w10: J1.3 1253.74,2083.74 1264,2094 1264,2094.91 1285.09,2116 1286,2116 1289.72,2119.72 U1.70
NetJ1_4: J1.4 U1.66 | length 1302.7
  Top Layer w10: J1.4 1169.74,2044 1381,2044 1385,2048 v1(1385,2060) ; v1(1385,2185) 1419,2219 1999.91,2219 2020.45,2198.46 U1.66
  Bottom Layer w10: v1(1385,2060) v1(1385,2185)
NetJ1_5: J1.5 U1.68 | length 1058.8
  Top Layer w10: J1.5 1220.16,2162.48 1236.96,2145.68 2210.79,2145.68 2221.42,2156.31 2225.15,2156.31 2227.94,2159.09 U1.68
NetJ1_6: J1.6 U1.65 | length 1166.2
  Top Layer w10: J1.6 1167.52,2200 1192.01,2200 1192.85,2200.84 1340.84,2200.84 1380,2240 2175.25,2240 2197.1,2218.15 U1.65
NetJ1_7: J1.7 U1.67 | length 1182.1
  Top Layer w10: J1.7 1217.3,2249.78 1217.3,2272.3 1230,2285 v1(1985,2285) ; v1(1985,2183) 1990.13,2177.87 2227.03,2177.87 2227.94,2178.78 U1.67
  Bottom Layer w10: v1(1985,2183) v1(1985,2285)
NetJ1_9: J1.9 U1.71 | length 1307.5
  Top Layer w10: J1.9 1211.26,2322.48 1297.48,2322.48 v1(1300,2325) ; v1(1300,2080) 1300,2090 1310.04,2100.04 U1.71
  Bottom Layer w10: v1(1300,2080) v1(1300,2325)
NetJ_USB1_A5: J_USB1.A5 R10.1 | length 542.7
  Top Layer w10: J_USB1.A5 1282.17,3237.17 1337.05,3292.05 R10.1
NetJ_USB1_B5: J_USB1.B5 R11.1 | length 504.6
  Top Layer w10: J_USB1.B5 1225.91,3118.15 1326.85,3118.15 1337.05,3107.95 R11.1
NetL1_1: L1.1 U_REG1.8 U_REG1.9 | length 694.1
  Top Layer w8: L1.1 1772.8,4210 1915.31,4210 1920,4205.31 1920,3817.19 1915.31,3812.5 1850.87,3812.5 1846.18,3807.82 U_REG1.9 U_REG1.8
NetL2_1: L2.1 U_REG2.8 U_REG2.9 | length 648.4
  Top Layer w8: L2.1 2360.3,4210 2505,4210 2510,4205 2510,3832.6 2461.18,3783.78 U_REG2.9 U_REG2.8
NetL3_1: L3.1 U_REG3.8 U_REG3.9 | length 845.4
  Top Layer w8: L3.1 2952.8,4205 3145.31,4205 3150,4200.31 3150,3990 v1(3155,3985) ; v1(2985,3985) 2986.18,3983.82 U_REG3.9 U_REG3.8
  Bottom Layer w8: v1(2985,3985) v1(3155,3985)
NetR1_1: R1.1 START.2 U1.107 | length 3789.4
  Top Layer w10: U1.107 2997.13,1785.86 3002.98,1780 3639.09,1780 3640.09,1779 3669.91,1779 3670.91,1780 3914.14,1780 3920,1774.14 3920,1695.86 3925.86,1690 5884.14,1690 5910,1664.14 5910,1510 v1(5915,1505) ; v1(5910,1400) 5840.86,1400 5835,1394.14 5835,1350.55 START.2 5966.73,1340 5974.02,1347.28 R1.1
  Bottom Layer w10: v1(5910,1400) 5910,1500 v1(5915,1505)
NetR2_1: R2.1 RESET.2 U1.106 | length 3165.6
  Top Layer w10: U1.106 2977.44,1767.56 2995,1750 3889.14,1750 3895,1744.14 3895,1670 3905,1660 5020,1660 v1(5020,1560) ; v1(5025,1435) 4940.31,1435 4934.45,1429.14 RESET.2 5284.02,1340 5309.02,1365 R2.1
  Bottom Layer w10: v1(5020,1560) 5020,1440 v1(5025,1435)
NetR3_1: R3.1 U1.122 | length 1145.1
  Top Layer w10: U1.122 3089.99,2335.91 3144.09,2335.91 3164.22,2315.78 3164.22,2290.78 v1(3170,2285) ; v1(3250,2285) 4139.14,2285 4145,2290.86 R3.1
  Bottom Layer w10: v1(3170,2285) v1(3250,2285)
NetR4_1: R4.1 U1.138 | length 2409.4
  Top Layer w10: U1.138 3159.14,2651.22 3165,2657.08 3165,2724.14 3170.86,2730 3449.14,2730 3455,2735.86 3455,3835 3490,3870 4229.14,3870 4235,3864.14 4235,3797.56 4230.16,3792.72 R4.1
NetR5_1: R5.1 U1.136 | length 2069.1
  Top Layer w10: U1.136 3198.14,2611.85 3204,2617.71 3204,2669 3215,2680 3499.14,2680 3505,2685.86 3505,3764.14 3528.57,3787.72 R5.1
NetR6_1: R6.1 U1.139 | length 2558.7
  Top Layer w10: U1.139 3134.14,2670.91 3134.98,2671.74 3139.14,2671.74 3145,2677.6 3145,2740 3160,2755 3424.14,2755 3430,2760.86 3430,3880 3470,3920 4309.14,3920 4315,3914.14 R6.1
NetR7_1: R7.1 U1.134 | length 1784.1
  Top Layer w10: U1.134 3237.48,2572.48 3245,2580 3245,2619.14 3250.86,2625 3510,2625 v1(3515,2620) ; v1(3790,2620) 4394.14,2620 4400,2625.86 R7.1
  Bottom Layer w10: v1(3515,2620) 3564.09,2620 3565.09,2619 3739.91,2619 3740.91,2620 v1(3790,2620)
NetR8_1: R8.1 U1.141 | length 2854.8
  Top Layer w10: U1.141 3089.3,2710.62 3058.5,2710.62 3046.16,2722.96 3046.16,2776.33 3064.83,2795 3389.14,2795 3395,2800.86 3395,3905 3445,3955 4494.14,3955 4500,3949.14 R8.1
NetR9_1: R9.1 U1.137 | length 2245.2
  Top Layer w10: U1.137 3174.14,2631.53 3177.61,2635 3179.14,2635 3185,2640.86 3185,2700 3195,2710 3479.14,2710 3485,2715.86 3485,3810 3515,3840 4105,3840 4115,3830 R9.1
NetR15_1: R15.1 U1.135 | length 1549.7
  Top Layer w10: U1.135 3212.16,2592.16 3220,2600 3220,2645 3230,2655 3499.09,2655 3500.09,2656 3529.91,2656 3530.91,2655 v1(3580,2655) ; v1(3725,2655) 3774.09,2655 3775.09,2656 3804.91,2656 3805.91,2655 4184.14,2655 4200,2670.86 R15.1
  Bottom Layer w10: v1(3580,2655) v1(3725,2655)
"NetSwitch 1_2": "Switch 1.2" U1.101 | length 1196.6
  Top Layer w10: 2225,1435 v1(2365,1435) ; v1(2365,1580) 2365,1875 2364.14,1875.86 2383.71,1895.43 2845.43,1895.43 2879.01,1929.01 U1.101
  Bottom Layer w10: v1(2365,1435) v1(2365,1580)
"NetSwitch 2_2": "Switch 2.2" U1.102 | length 724.1
  Top Layer w10: 2745,1435 v1(2895,1435) ; v1(2895,1585) 2898.7,1588.7 U1.102
  Bottom Layer w10: v1(2895,1435) v1(2895,1585)
"NetSwitch 3_2": "Switch 3.2" U1.104 | length 890.7
  Top Layer w10: U1.104 2938.07,1651.93 2965,1625 v1(2965,1585) ; v1(2965,1430) 2970,1435 3265,1435
  Bottom Layer w10: v1(2965,1430) v1(2965,1585)
"NetSwitch 4_2": "Switch 4.2" U1.105 | length 1391.6
  Top Layer w10: U1.105 2957.75,1693.1 2965.86,1685 3374.14,1685 3380,1679.14 v1(3380,1575) ; v1(3380,1435) 3785,1435
  Bottom Layer w10: v1(3380,1435) v1(3380,1575)
NetU_REG1_4: C6.2 U_REG1.4 | length 125
  Top Layer w8: U_REG1.4@1795,3516.81 1795,3465 1802.72,3457.28 C6.2
NetU_REG2_4: C7.2 U_REG2.4 | length 139.1
  Top Layer w8: U_REG2.4 2410,3504.66 2415.43,3499.22 C7.2
NetU_REG3_4: C8.2 U_REG3.4 | length 142.9
  Top Layer w8: U_REG3.4 2935,3509.66 2937.72,3506.94 C8.2
pads on no net: 7Sigemnt.4 7Sigemnt.7 7Sigemnt.9 J_USB1.A6 J_USB1.A7 J_USB1.A8 J_USB1.B6 J_USB1.B7 J_USB1.B8 U1.1 U1.2 U1.3 U1.4 U1.7 U1.8 U1.9 U1.10 U1.11 U1.12 U1.15 U1.16 U1.17 U1.18 U1.19 U1.20 U1.21 U1.22 U1.23 U1.24 U1.25 U1.26 U1.28 U1.29 U1.31 U1.32 U1.33 U1.34 U1.37 U1.38 U1.39 U1.40 U1.41 U1.42 U1.43 U1.44 U1.45 U1.47 U1.48 U1.49 U1.50 U1.52 U1.53 U1.54 U1.55 U1.56 U1.58 U1.60 U1.61 U1.62 U1.63 U1.64 U1.73 U1.74 U1.75 U1.76 U1.77 U1.78 U1.79 U1.80 U1.81 U1.82 U1.83 U1.84 U1.85 U1.87 U1.88 U1.90 U1.91 U1.93 U1.94 U1.95 U1.96 U1.97 U1.98 U1.99 U1.109 U1.110 U1.116 U1.117 U1.118 U1.119 U1.120 U1.121 U1.124 U1.125 U1.126 U1.127 U1.128 U1.130 U1.131 U1.142 U1.143 U1.144 U_REG1.5 U_REG1.12 U_REG1.13 U_REG2.5 U_REG2.12 U_REG2.13 U_REG3.5 U_REG3.12 U_REG3.13